# EAGLE board DCSwitch_quad (EAGLE 5.11)
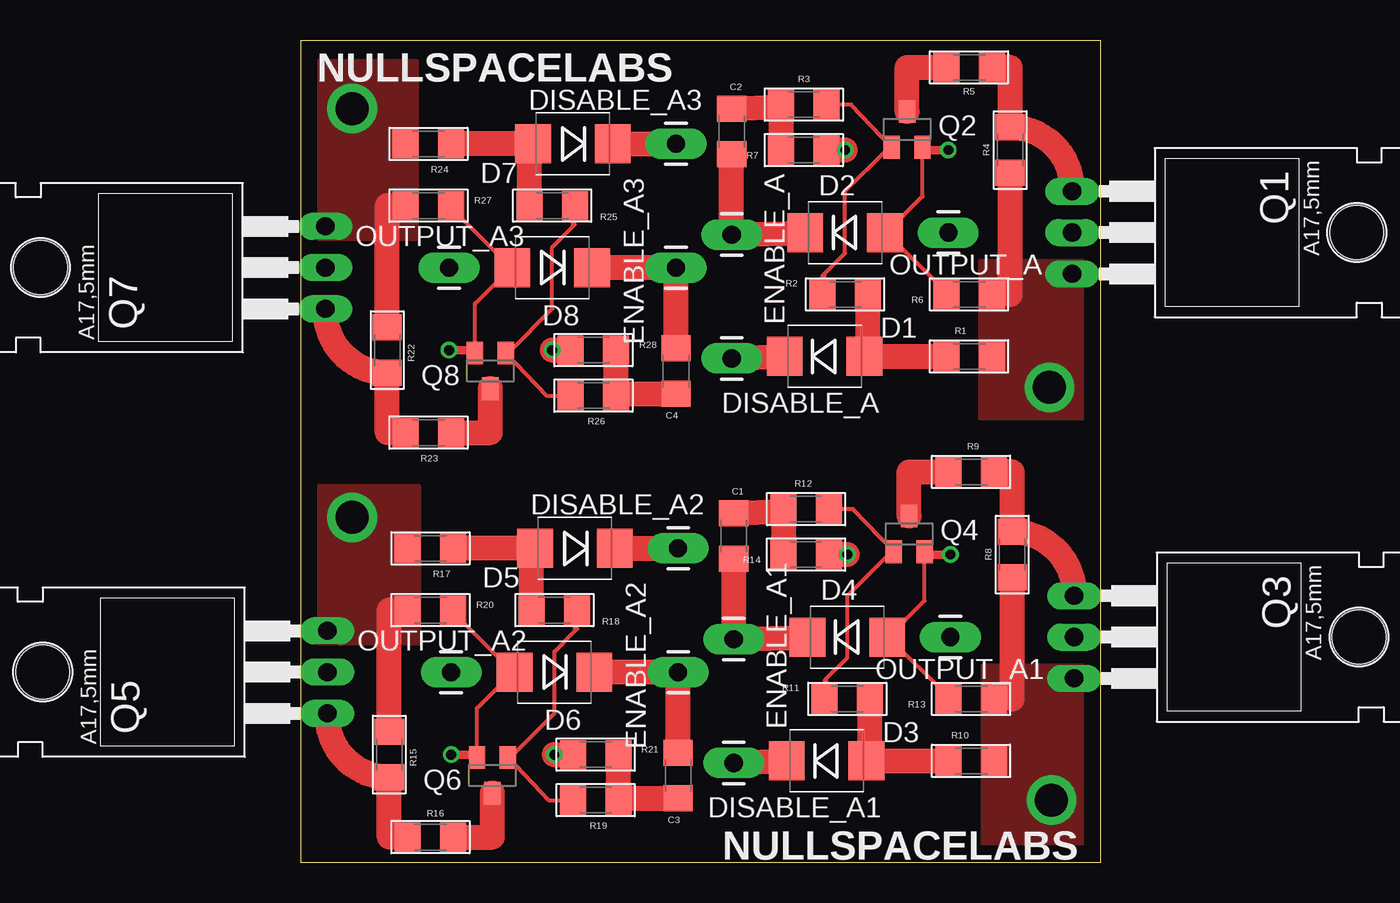
[diagram p0: board, top side]
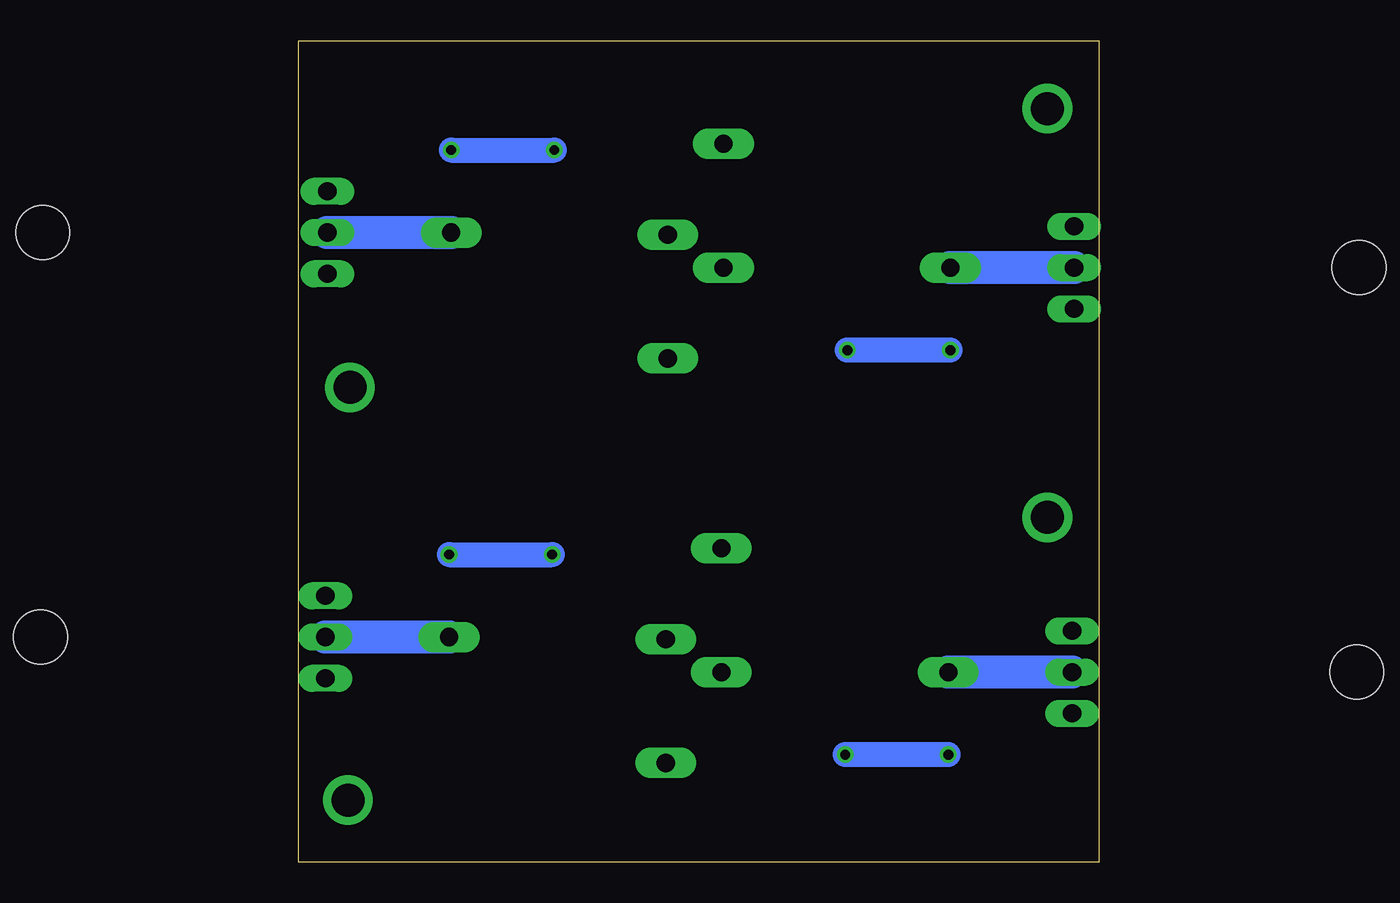
[diagram p1: board, bottom side, seen from below]

Size 49.28 x 50.55 mm. Coordinates in mm from the lower left corner, seen from the top.
Outline: 0,50.55 0,0 49.28,0 49.28,50.55 0,50.55
Copper layers (1*16): Top 0.035mm / dielectric 1.5mm / Bottom 0.035mm
Design rules "default": minimum track width 10mil, minimum drill 24mil, track to track 8mil, track to pad 8mil, pad to pad 8mil, via to via 8mil, smd to smd 8mil, copper to edge 40mil, drill to drill 8mil, minimum pad ring 10mil, minimum via ring 8mil, stop-mask expansion 4mil, vias tented up to drill 0mil, thermal gap 10mil
Net classes: 1 power: width 0.762 mm, drill 0.508 mm, clearance 0.508 mm

## Footprints (pad centres in the part's own frame; a part is rotated, then mirrored left to right if it is on the bottom)
1206 = smd 1.6 x 1.8: 1 -1.4,0; 2 1.4,0
DIODE-HV = smd 2.2 x 2.4: A 2.454,0; C -2.454,0
1X01_LONGPAD = drill 1.118 pad 1.88 long: 1 0,0
TO220 = drill 1.118 long: 1 -2.54,0; 2 0,0; 3 2.54,0 | hole 3.302: 0,17.526
SOT23-BEC = smd 1 x 1.4: B -0.95,-1.1; C 0,1.1; E 0.95,-1.1

## Placement (x,y rotation side)
C1  [1206]  26.67,20.07 270 top
C2  [1206]  26.54,44.96 270 top
C3  [1206]  23.24,5.33 90 top
C4  [1206]  23.11,30.23 90 top
D1  [DIODE-HV]  32.26,31.11 0 top
D2  [DIODE-HV]  33.53,38.73 0 top
D3  [DIODE-HV]  32.39,6.22 0 top
D4  [DIODE-HV]  33.66,13.84 0 top
D5  [DIODE-HV]  16.89,19.3 180 top
D6  [DIODE-HV]  15.62,11.68 180 top
D7  [DIODE-HV]  16.76,44.2 180 top
D8  [DIODE-HV]  15.49,36.58 180 top
DISABLE_A  [1X01_LONGPAD]  26.54,30.99 90 top
DISABLE_A1  [1X01_LONGPAD]  26.67,6.1 90 top
DISABLE_A2  [1X01_LONGPAD]  23.24,19.3 270 top
DISABLE_A3  [1X01_LONGPAD]  23.11,44.2 270 top
ENABLE_A  [1X01_LONGPAD]  26.54,38.61 270 top
ENABLE_A1  [1X01_LONGPAD]  26.67,13.72 270 top
ENABLE_A2  [1X01_LONGPAD]  23.24,11.68 90 top
ENABLE_A3  [1X01_LONGPAD]  23.11,36.58 90 top
OUTPUT_A  [1X01_LONGPAD]  39.88,38.73 90 top
OUTPUT_A1  [1X01_LONGPAD]  40.01,13.84 90 top
OUTPUT_A2  [1X01_LONGPAD]  9.27,11.68 270 top
OUTPUT_A3  [1X01_LONGPAD]  9.14,36.58 270 top
Q1  FQP47P06TO220  [TO220]  47.5,38.73 270 top
Q2  [SOT23-BEC]  37.34,45.08 0 top
Q3  FQP47P06TO220  [TO220]  47.62,13.84 270 top
Q4  [SOT23-BEC]  37.47,20.19 0 top
Q5  FQP47P06TO220  [TO220]  1.65,11.68 90 top
Q6  [SOT23-BEC]  11.81,5.33 180 top
Q7  FQP47P06TO220  [TO220]  1.52,36.58 90 top
Q8  [SOT23-BEC]  11.68,30.23 180 top
R1  [1206]  41.15,31.11 180 top
R2  [1206]  33.53,34.92 180 top
R3  [1206]  30.99,46.61 180 top
R4  [1206]  43.69,43.81 90 top
R5  [1206]  41.15,48.89 180 top
R6  [1206]  41.15,34.92 180 top
R7  [1206]  30.99,43.81 180 top
R8  [1206]  43.82,18.92 90 top
R9  [1206]  41.28,24 180 top
R10  [1206]  41.28,6.22 180 top
R11  [1206]  33.66,10.03 180 top
R12  [1206]  31.11,21.72 180 top
R13  [1206]  41.28,10.03 180 top
R14  [1206]  31.11,18.92 180 top
R15  [1206]  5.46,6.6 270 top
R16  [1206]  8,1.52 0 top
R17  [1206]  8,19.3 0 top
R18  [1206]  15.62,15.49 0 top
R19  [1206]  18.16,3.81 0 top
R20  [1206]  8,15.49 0 top
R21  [1206]  18.16,6.6 0 top
R22  [1206]  5.33,31.5 270 top
R23  [1206]  7.87,26.42 0 top
R24  [1206]  7.87,44.2 0 top
R25  [1206]  15.49,40.39 0 top
R26  [1206]  18.03,28.7 0 top
R27  [1206]  7.87,40.39 0 top
R28  [1206]  18.03,31.5 0 top

## Library data of the parts
C1-C4 D1-D8 DISABLE_A DISABLE_A1-DISABLE_A3 ENABLE_A ENABLE_A1-ENABLE_A3 OUTPUT_A OUTPUT_A1-OUTPUT_A3 = SparkFun
Q1 Q3 Q5 Q7 = charliex-nsl
Q2 Q4 Q6 Q8 = transistor
R1-R28 = microbuilder

## Nets
+12V [power]: Q1.3 R1.1 R4.1 R6.1
+12V1 [power]: Q3.3 R8.1 R10.1 R13.1
+12V2 [power]: Q5.3 R15.1 R17.1 R20.1
+12V3 [power]: Q7.3 R22.1 R24.1 R27.1
GND: C2.1 R3.2 R7.2
GND1: C1.1 R12.2 R14.2
GND2: C3.1 R19.2 R21.2
GND3: C4.1 R26.2 R28.2
N$1: D1.A R1.2 R2.1
N$2: Q2.B R2.2 R3.1
N$3: D2.A Q2.E R6.2 R7.1
N$4: C2.2 D2.C ENABLE_A.1
N$5: Q2.C R5.2
N$6: Q1.1 R4.2 R5.1
N$7: OUTPUT_A.1 Q1.2
N$8: D1.C DISABLE_A.1
N$9: D3.A R10.2 R11.1
N$10: Q4.B R11.2 R12.1
N$11: C1.2 D4.C ENABLE_A1.1
N$12: Q4.C R9.2
N$13: Q3.1 R8.2 R9.1
N$14: D4.A Q4.E R13.2 R14.1
N$15: D3.C DISABLE_A1.1
N$16: OUTPUT_A1.1 Q3.2
N$17: D5.A R17.2 R18.1
N$18: Q6.B R18.2 R19.1
N$19: C3.2 D6.C ENABLE_A2.1
N$20: Q6.C R16.2
N$21: Q5.1 R15.2 R16.1
N$22: D6.A Q6.E R20.2 R21.1
N$23: D5.C DISABLE_A2.1
N$24: OUTPUT_A2.1 Q5.2
N$25: D7.A R24.2 R25.1
N$26: Q8.B R25.2 R26.1
N$27: C4.2 D8.C ENABLE_A3.1
N$28: Q8.C R23.2
N$29: Q7.1 R22.2 R23.1
N$30: D8.A Q8.E R27.2 R28.1
N$31: D7.C DISABLE_A3.1
N$32: OUTPUT_A3.1 Q7.2

## Tracks (layer width: path | path; a pad name or v marks a point on that pad's centre or on a via)
+12V  (via drill 2.03)
  Top 1.524: 43.69,34.92 R4.1
  other vias: 46.1,29.21
  pour Top (no thermals): 41.83,36.96 41.83,27.31 50.04,27.31 50.16,36.96
+12V1  (via drill 2.03)
  Top 1.524: 43.82,10.03 R8.1
  other vias: 46.23,3.81
  pour Top (no thermals): 41.96,12.06 41.96,1.14 50.16,1.14 50.29,12.06
+12V2  (via drill 2.03)
  Top 1.524: R15.1 5.46,15.49
  other vias: 3.17,21.21
  pour Top (no thermals): 7.32,13.46 7.32,23.11 0.38,23.11 0.25,13.46
+12V3  (via drill 2.03)
  Top 1.524: R22.1 5.33,40.39
  other vias: 3.17,46.36
  pour Top (no thermals): 7.19,38.35 7.19,49.28 0.25,49.28 0.13,38.35
GND
  Top 0.254: 29.46,46.48 R3.2
  Top 1.524: C2.1 29.46,46.48 | R3.2 R7.2
GND1
  Top 0.254: 29.58,21.59 R12.2
  Top 1.524: C1.1 29.58,21.59 | R12.2 R14.2
GND2
  Top 0.254: R19.2 19.69,3.93
  Top 1.524: 19.69,3.93 C3.1 | R19.2 R21.2
GND3
  Top 0.254: R26.2 19.56,28.83
  Top 1.524: 19.56,28.83 C4.1 | R26.2 R28.2
N$1
  Top 0.254: D1.A 34.8,31.11 34.93,31.25
  Top 1.524: 34.8,31.11 R1.2 | 34.93,31.25 R2.1
N$2
  Top 0.254: 32.26,36.19 32.13,36.06 | 32.26,36.19 33.53,37.47 33.53,41.28 36.07,43.81 Q2.B 33.89,46.61 R3.1 | 32.26,36.19 32.26,34.92 R2.2
N$3  (via drill 0.61)
  Top 0.254: 36.07,38.73 38.29,40.95 Q2.E 38.61,43.81 | R6.2 39.75,35.06 36.07,38.73 | D2.A 36.07,38.73
  Top 0.508: 38.61,43.81 v39.88,43.81
  Top 1.524: v33.53,43.81 R7.1
  Bottom 1.524: v39.88,43.81 v33.53,43.81
N$4
  Top 1.524: C2.2 ENABLE_A.1 D2.C
N$5
  Top 1.524: R5.2 37.34,48.89 Q2.C
N$6
  Top 0.254: Q1.1 47.5,41.41
  Top 1.524: 47.5,41.41 arc90 R4.2 43.69,48.89 R5.1
N$7
  Bottom 2.032: OUTPUT_A.1 Q1.2
N$8
  Top 1.524: DISABLE_A.1 D1.C
N$9
  Top 0.254: D3.A 34.93,6.22 35.05,6.35
  Top 1.524: 34.93,6.22 R10.2 | 35.05,6.35 R11.1
N$10
  Top 0.254: 32.39,11.3 32.26,11.17 | 32.39,11.3 33.66,12.57 33.66,16.38 36.2,18.92 Q4.B 34.02,21.72 R12.1 | 32.39,11.3 32.39,10.03 R11.2
N$11
  Top 1.524: C1.2 ENABLE_A1.1 D4.C
N$12
  Top 1.524: R9.2 37.47,24 Q4.C
N$13
  Top 0.254: 47.62,16.51 Q3.1
  Top 1.524: 47.62,16.51 arc90 R8.2 43.82,24 R9.1
N$14  (via drill 0.61)
  Top 0.254: 36.2,13.84 38.41,16.06 Q4.E 38.73,18.92 | R13.2 39.88,10.16 36.2,13.84 | 36.2,13.84 D4.A
  Top 0.508: 38.73,18.92 v40.01,18.92
  Top 1.524: v33.66,18.92 R14.1
  Bottom 1.524: v40.01,18.92 v33.66,18.92
N$15
  Top 1.524: DISABLE_A1.1 D3.C
N$16
  Bottom 2.032: OUTPUT_A1.1 Q3.2
N$17
  Top 0.254: D5.A 14.35,19.3 14.22,19.17
  Top 1.524: 14.35,19.3 R17.2 | R18.1 14.22,19.17
N$18
  Top 0.254: 16.89,14.22 17.02,14.35 | 16.89,14.22 15.62,12.95 15.62,9.14 13.08,6.6 Q6.B 15.26,3.81 R19.1 | 16.89,14.22 16.89,15.49 R18.2
N$19
  Top 1.524: C3.2 ENABLE_A2.1 D6.C
N$20
  Top 1.524: R16.2 11.81,1.52 Q6.C
N$21
  Top 0.254: 1.65,9.01 Q5.1
  Top 1.524: 1.65,9.01 arc90 R15.2 5.46,1.52 R16.1
N$22  (via drill 0.61)
  Top 0.254: 13.08,11.68 10.86,9.46 Q6.E 10.54,6.6 | R20.2 9.4,15.36 13.08,11.68 | 13.08,11.68 D6.A
  Top 0.508: 10.54,6.6 v9.27,6.6
  Top 1.524: v15.62,6.6 R21.1
  Bottom 1.524: v9.27,6.6 v15.62,6.6
N$23
  Top 1.524: D5.C DISABLE_A2.1
N$24
  Bottom 2.032: Q5.2 OUTPUT_A2.1
N$25
  Top 0.254: D7.A 14.22,44.2 14.09,44.07
  Top 1.524: 14.22,44.2 R24.2 | R25.1 14.09,44.07
N$26
  Top 0.254: 16.76,39.12 16.89,39.25 | 16.76,39.12 15.49,37.85 15.49,34.04 12.95,31.5 Q8.B 15.13,28.7 R26.1 | 16.76,39.12 16.76,40.39 R25.2
N$27
  Top 1.524: C4.2 ENABLE_A3.1 D8.C
N$28
  Top 1.524: R23.2 11.68,26.42 Q8.C
N$29
  Top 0.254: 1.52,33.91 Q7.1
  Top 1.524: 1.52,33.91 arc90 R22.2 5.33,26.42 R23.1
N$30  (via drill 0.61)
  Top 0.254: 12.95,36.58 10.73,34.36 Q8.E 10.41,31.5 | R27.2 9.27,40.26 12.95,36.58 | 12.95,36.58 D8.A
  Top 0.508: 10.41,31.5 v9.14,31.5
  Top 1.524: v15.49,31.5 R28.1
  Bottom 1.524: v9.14,31.5 v15.49,31.5
N$31
  Top 1.524: D7.C DISABLE_A3.1
N$32
  Bottom 2.032: Q7.2 OUTPUT_A3.1

## Text on the board
tNames: NULLSPACELABS | NULLSPACELABS